# Altium PCB extBoard.PcbDoc
Units mm, origin at the board's own origin, x right, y up, seen from the top; angles counter-clockwise.
Board outline 77.47 x 63.5 mm, 2 copper layers (Top Layer, Bottom Layer); 44 components, 47 nets, 267 pads, 60 vias.
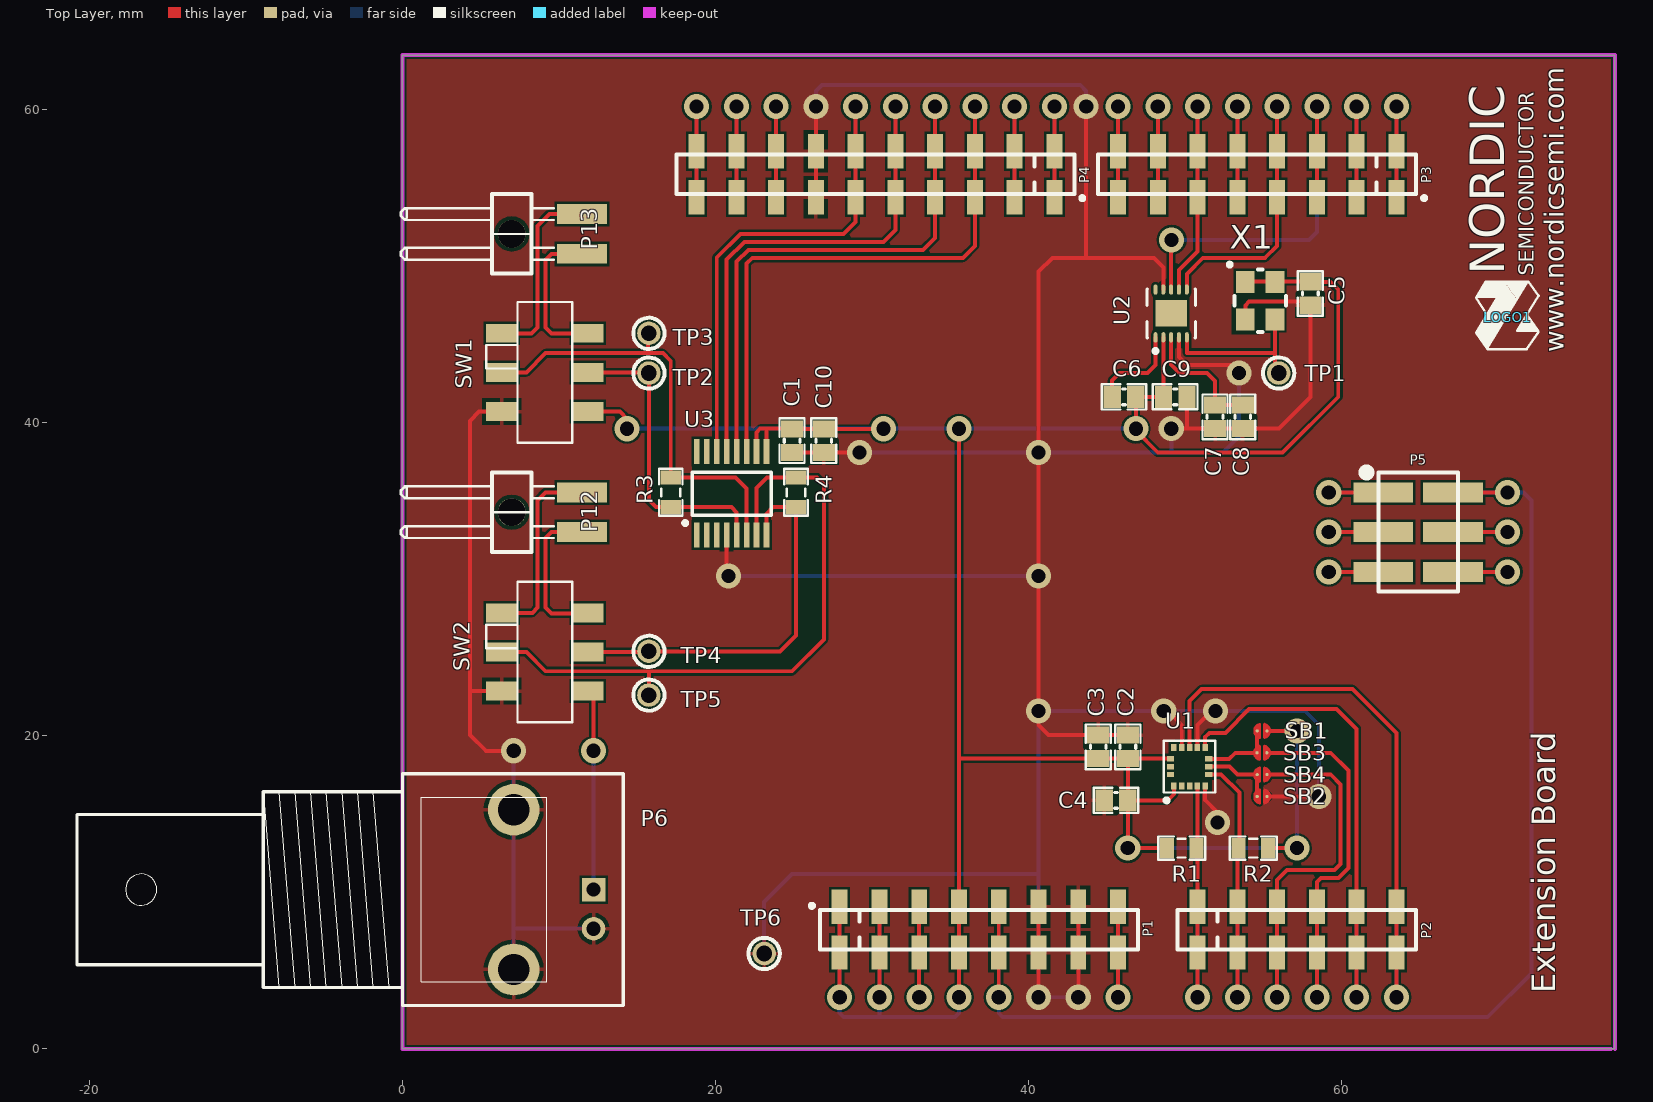
[diagram p0: Top Layer view]
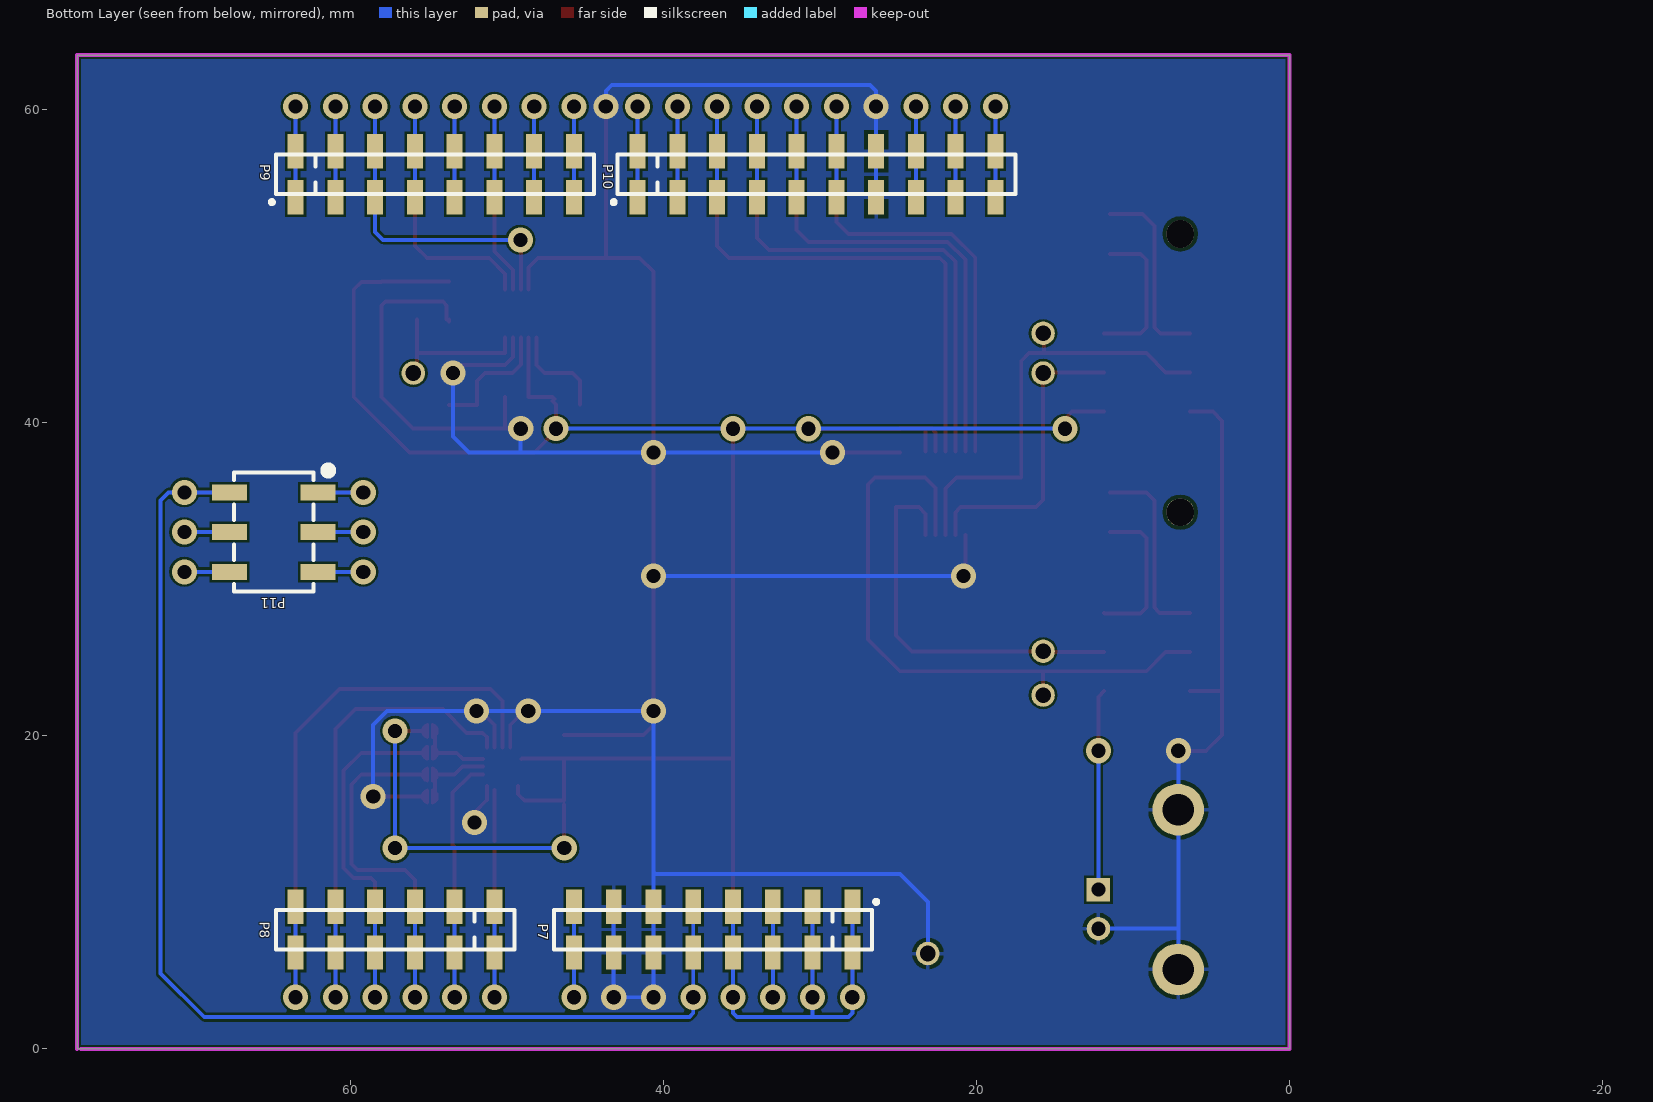
[diagram p1: Bottom Layer view, seen from below]
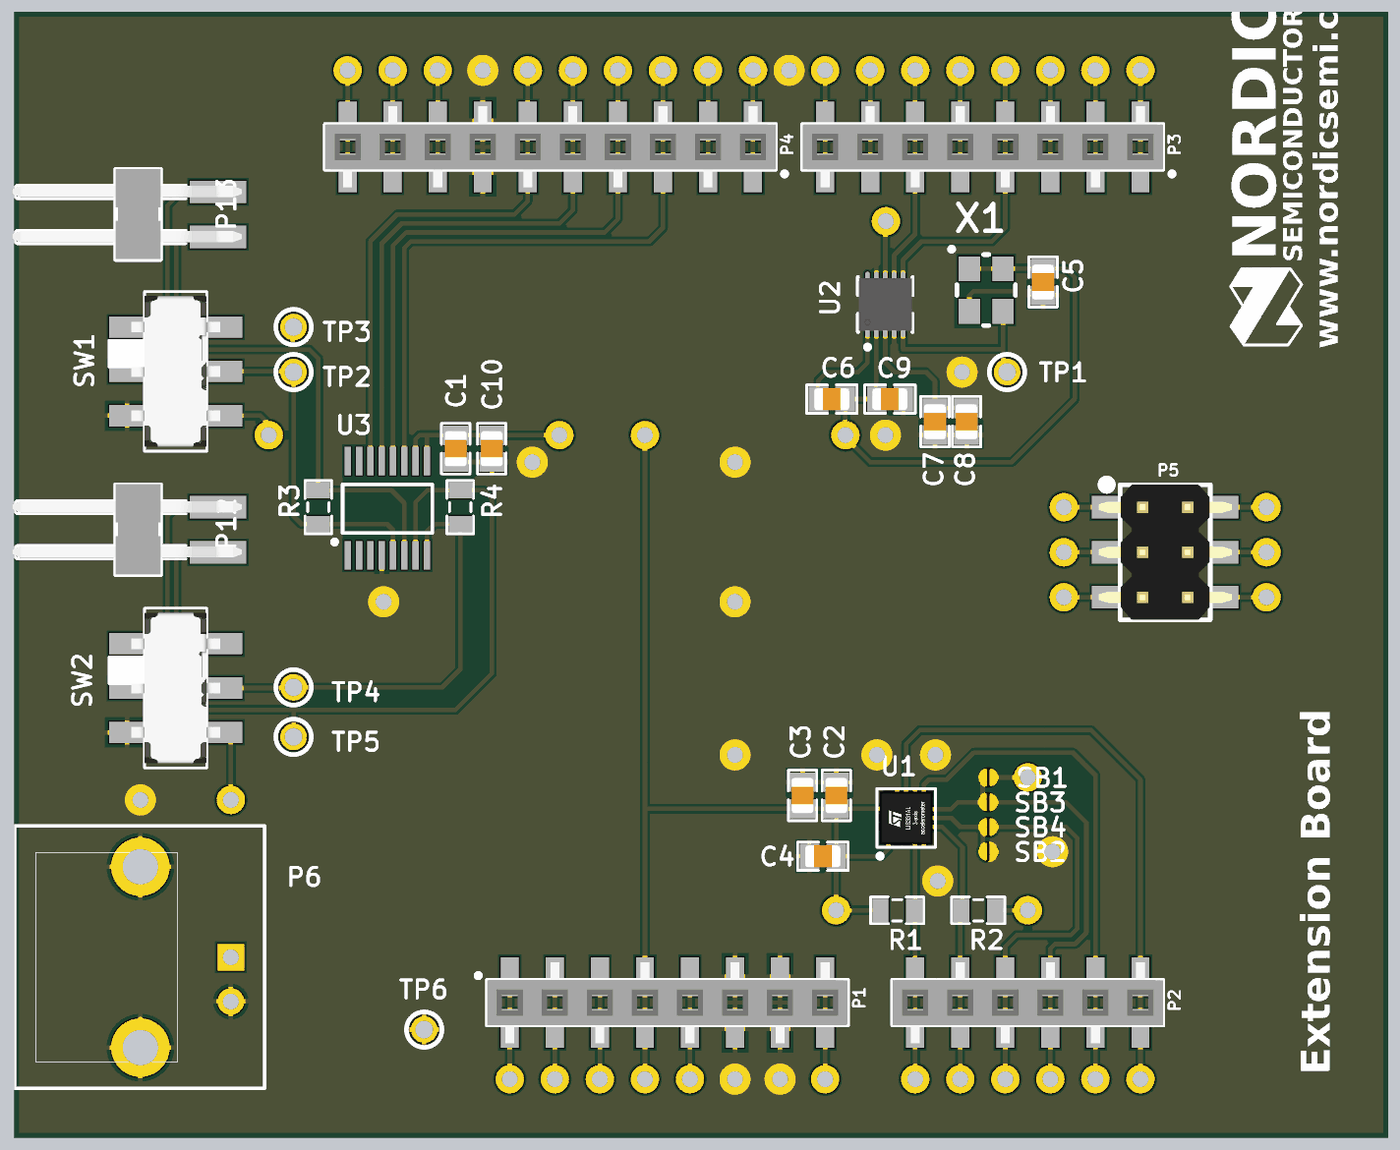
[diagram p2: 3D render of the assembled board from above, using the file's embedded part models]

## Layer stack, top to bottom
Top Solder: solder mask 0.01, Solder Resist, Dk 3.5
Top Layer: signal copper 0.035
Dielectric1: core 0.32, FR-4, Dk 4.8
Bottom Layer: signal copper 0.035
Bottom Solder: solder mask 0.01, Solder Resist, Dk 3.5

## Board outline
0,0 0,63.5 77.47,63.5 77.47,0

## Design rules (kind name [scope] priority, off if disabled: settings)
Clearance USB_Poly_Clearance [(InNamedPolygon('Top_Layer-GND')) vs (OnLayer('Mechanical 3'))] p1: gap=0.254 ignorepadtopadclearanceinfootprint=FALSE except(0: Arc-Hole Track-Hole SMDPad-Hole THPad-Hole Via-Hole Fill-Hole Poly-Hole Region-Hole Text-Hole)
Clearance "NPTH clearance" [Not PadIsPlated And HoleSize > 0] p2: gap=0.229 ignorepadtopadclearanceinfootprint=FALSE except(0: Arc-Hole Track-Hole SMDPad-Hole THPad-Hole Via-Hole Fill-Hole Poly-Hole Region-Hole Text-Hole)
Clearance USB_Clearance [(InDifferentialPairClass('All Differential Pairs'))] p3: gap=0.152 ignorepadtopadclearanceinfootprint=FALSE except(0: Arc-Hole Track-Hole SMDPad-Hole THPad-Hole Via-Hole Fill-Hole Poly-Hole Region-Hole Text-Hole)
Clearance ANT_Clerance [InNet('ANT') or InNet('RF')] p4: gap=0.203 ignorepadtopadclearanceinfootprint=FALSE except(0: Arc-Hole Track-Hole SMDPad-Hole THPad-Hole Via-Hole Fill-Hole Poly-Hole Region-Hole Text-Hole)
Clearance Polygon_Clearance [(InNamedPolygon('Top_Layer-GND')) or (InNamedPolygon('Bottom_Layer-GND')) or (InNamedPolygon('Mid_Layer_1-GND')) or (InNamedPolygon('Mid_Layer_2-VDD'))] p5: gap=0.254 ignorepadtopadclearanceinfootprint=FALSE except(0: Arc-Hole Track-Hole SMDPad-Hole THPad-Hole Via-Hole Fill-Hole Poly-Hole Region-Hole Text-Hole)
Clearance SB_Clearance [HasFootprint('Solderbridge') or HasFootprint('QFN40P180X140X55-10N')] p6: gap=0.127 ignorepadtopadclearanceinfootprint=FALSE except(0: Arc-Hole Track-Hole SMDPad-Hole THPad-Hole Via-Hole Fill-Hole Poly-Hole Region-Hole Text-Hole)
Clearance CSP_Clearance [HasFootprint('BGA4C40P2X2_76X76X62')] p7: gap=0.127 ignorepadtopadclearanceinfootprint=FALSE except(0: Arc-Hole Track-Hole SMDPad-Hole THPad-Hole Via-Hole Fill-Hole Poly-Hole Region-Hole Text-Hole)
Clearance P23_Clearance [HasFootprint('FPC_05P-0.5mm-RA-SMD')] p8: gap=0.127 ignorepadtopadclearanceinfootprint=FALSE except(0: Arc-Hole Track-Hole SMDPad-Hole THPad-Hole Via-Hole Fill-Hole Poly-Hole Region-Hole Text-Hole)
Clearance PSON35P100X50-8N_Clearance [HasFootprint('PSON35P100X50-8N')] p9: gap=0.15 ignorepadtopadclearanceinfootprint=FALSE except(0: Arc-Hole Track-Hole SMDPad-Hole THPad-Hole Via-Hole Fill-Hole Poly-Hole Region-Hole Text-Hole)
Clearance Top_layer_Clearance [All vs OnLayer('Top Layer')] p10: gap=0.145 ignorepadtopadclearanceinfootprint=FALSE except(0: Arc-Hole Track-Hole SMDPad-Hole THPad-Hole Via-Hole Fill-Hole Poly-Hole Region-Hole Text-Hole)
Clearance [All] p11: gap=0.15 ignorepadtopadclearanceinfootprint=FALSE except(0: Arc-Hole Track-Hole SMDPad-Hole THPad-Hole Via-Hole Fill-Hole Poly-Hole Region-Hole Text-Hole)
ComponentClearance [All] p1 off: gap=0.254 collisioncheckmode=3 verticalgap=0.254 showdistances=FALSE
DiffPairsRouting [All] p1: maxlimit=0.254 minlimit=0.191 mostfreqgap=0.193 toplayer_minwidth=0.165 toplayer_maxwidth=0.165 toplayer_prefwidth=0.165 bottomlayer_minwidth=0.165 bottomlayer_maxwidth=0.165 bottomlayer_prefwidth=0.165 maxuncoupledlength=12.7
FabricationTestPointUsage TestPointUsage [All] p1: valid=0 allowmultiple=FALSE
FabricationTestpoint Testpoint [All] p1: side=3 testpointundercomponent=TRUE minsize=1.016 maxsize=2.54 preferedsize=1.524 minholesize=0 maxholesize=1.016 preferedholesize=0.813 testpointgrid=0.025 allowsidetop=TRUE allowsidebottom=TRUE usegrid=TRUE gridtolerance=0
Height [All] p1 off: minheight=0 maxheight=25.4 prefheight=12.7
HoleSize [All] p1: absolutevalues=TRUE maxlimit=5 minlimit=0.15 maxpercent=80.000 minpercent=20.000
MinimumAnnularRing [All] p1 off: minimumring=0.152
NetAntennae NetAntennae_ANT [InNet('ANT')] p1: netantennaetolerance=40
NetAntennae [All] p2: netantennaetolerance=0
PolygonConnect PolygonConnect_1 [isVia and innet(gnd) or isVia and innet('VDD') or HasFootprint('COAXIAL-SWF') or isVia and innet('VDD_SAM')] p1: connectstyle=Direct reliefconductorwidth=0.254 reliefentries=4 polygonreliefangle="90 Angle" airgapwidth=0.254
PolygonConnect [All] p2: connectstyle=Relief reliefconductorwidth=0.254 reliefentries=4 polygonreliefangle="90 Angle" airgapwidth=0.254
RoomDefinition extBoard_sheet2_acc [InComponentClass('extBoard_sheet2_acc')] p1: confinementstyle=ConfineIn formatcopy=TRUE lockcomponents=FALSE outline 126.467,-15.482 154.432,-15.482 154.432,-9.64 126.467,-9.64
RoomDefinition extBoard_sheet5_connectors [InComponentClass('extBoard_sheet5_connectors')] p2: confinementstyle=ConfineIn formatcopy=TRUE lockcomponents=FALSE outline 135.757,29.527 147.999,29.527 147.999,45.656 135.757,45.656
RoomDefinition extBoard_sheet4_adc [InComponentClass('extBoard_sheet4_adc')] p3: confinementstyle=ConfineIn formatcopy=TRUE lockcomponents=FALSE outline 135.757,17.792 183.255,17.792 183.255,28.257 135.757,28.257
RoomDefinition extBoard_sheet3_interrupt_generator [InComponentClass('extBoard_sheet3_interrupt_generator')] p4: confinementstyle=ConfineIn formatcopy=TRUE lockcomponents=FALSE outline 135.757,8.496 170.809,8.496 170.809,16.522 135.757,16.522
RoutingVias RoutingVias_0.9mm [All] p1: holewidth=0.9 width=1.6 viastyle="Through Hole" minholewidth=0.9 minwidth=1.6 maxholewidth=0.9 maxwidth=1.6
RoutingVias [All] p2 off: holewidth=0.305 width=0.61 viastyle="Through Hole" minholewidth=0.15 minwidth=0.35 maxholewidth=0.305 maxwidth=0.61
SilkToSolderMaskClearance SilkscreenOverComponentPads [IsPad] p1: minsilkscreentomaskgap=0.254 clearancetoexposedcopper=TRUE
SolderMaskExpansion [All] p1: expansion=0.076
UnpouredPolygon [All] p1 off:
Width Width_10mil [All] p1: maxlimit=0.254 minlimit=0.254 preferedwidth=0.254
Width Width_Diff [(InDifferentialPairClass('All Differential Pairs'))] p2 off: maxlimit=0.165 minlimit=0.165 preferedwidth=0.165
Width [All] p3 off: maxlimit=10.16 minlimit=0.145 preferedwidth=0.152 bottomlayer_minwidth=0.152 minimp=50.000000 maximp=50.000000 favimp=50.000000
21 further rules are at their usual default settings.

## Classes and differential pairs
net class X1_Nets: GND MCLK VDK
net class U3_Nets: ADC_C\S\ ADC_MISO ADC_MOSI ADC_SCK AINN AINP GND NetU3_1 NetU3_2 NetU3_3 NetU3_15 NetU3_16 REFN REFP VDK
net class U2_Nets: D2 D3 D5 GND MCLK NetC6_1 NetC7_2 NetU2_10 VDK
net class SW2_Nets: AINN AINP EXT_AINN EXT_AINP GEN_ANALOG GND
net class SW1_Nets: EXT_REFN EXT_REFP GND REFN REFP VDK
net class R4_Nets: AINN AINP
net class R3_Nets: REFN REFP
net class R2_Nets: A1 VDK
net class P13_Nets: EXT_REFN EXT_REFP
net class P12_Nets: EXT_AINN EXT_AINP
net class P11_Nets: NetP5_1 NetP5_3 NetP5_4 NetP5_5 NetP5_6 V5V
net class P10_Nets: ADC_C\S\ ADC_MISO ADC_MOSI ADC_SCK AREF D8 D9 GND SCL SDA
net class P9_Nets: D0 D1 D2 D3 D4 D5 D6 D7
net class P8_Nets: A0 A1 A2 A3 A4 A5
net class P7_Nets: GND RESET_PIN V5V VDK VIN
net class P6_Nets: GEN_ANALOG GND
net class P5_Nets: NetP5_1 NetP5_3 NetP5_4 NetP5_5 NetP5_6 V5V
net class P4_Nets: ADC_C\S\ ADC_MISO ADC_MOSI ADC_SCK AREF D8 D9 GND SCL SDA
net class P3_Nets: D0 D1 D2 D3 D4 D5 D6 D7
net class P2_Nets: A0 A1 A2 A3 A4 A5
net class P1_Nets: GND RESET_PIN V5V VDK VIN
net class C10_Nets: GND VDK
net class C9_Nets: GND VDK
net class C8_Nets: GND NetC7_2
net class C7_Nets: GND NetC7_2
net class C6_Nets: NetC6_1 VDK
net class C5_Nets: GND VDK
net class C4_Nets: GND VDK
net class C3_Nets: GND VDK
net class C2_Nets: GND VDK
net class C1_Nets: GND VDK
component class extBoard_sheet4_adc: C1 C10 R3 R4 SW1 SW2 TP2 TP3 TP4 TP5 U3
component class extBoard_sheet2_acc: C2 C3 C4 R1 R2 SB1 SB2 SB3 SB4 U1
component class extBoard_sheet3_interrupt_generator: C5 C6 C6,C7 C7 C8 C9 TP1 U2 X1
component class extBoard_sheet5_connectors: P1 P2 P3 P4 P5 P6 P7 P8 P9 P10 P11 P12 P13 TP6
net class TP1_Nets: MCLK
net class TP2_Nets: REFP
net class TP3_Nets: REFN
net class TP4_Nets: AINP
net class TP5_Nets: AINN
net class TP6_Nets: GND
net class SB1_Nets: NetSB1_2 VDK
net class SB2_Nets: GND NetSB2_1
net class SB3_Nets: A3 NetSB1_2
net class SB4_Nets: A2 NetSB2_1
net class U1_Nets: A0 A1 A4 A5 GND NetSB1_2 NetSB2_1 NetU?_2 NetU?_3 NetU?_13 NetU?_15 NetU?_16 VDK
net class R1_Nets: A0 VDK

## Components (designator, comment, footprint, x,y, rotation, side; value= is the part's Value field where it differs from the comment)
C1 "0.1µF" CAPC2012X11L 24.892,38.862 r90 top
C2 "10µF" CAPC2012X11L 46.355,19.304 r270 top
C3 "0.1µF" CAPC2012X11L 44.45,19.304 r270 top
C4 "0.1µF" CAPC2012X11L 45.593,15.875 r0 top
C5 "0.1µF" CAPC2012X11L 58.012,48.261 r90 top
C6 "0.01µF" CAPC2012X11L 46.101,41.656 r0 top
C7 "10µF" CAPC2012X11L 51.916,40.387 r90 top
C8 "0.1µF" CAPC2012X11L 53.694,40.387 r90 top
C9 "0.1µF" CAPC2012X11L 49.376,41.657 r180 top
C10 "0.1µF" CAPC2012X11L 26.924,38.862 r90 top
LOGO1 "Nordic Logo M" NORDIC_LOGO_M 70.612,46.736 r90 top
P1 "Socket 1x8" SOCKET_1x8_SMD 27.94,7.62 r0 top locked
P2 "Socket 1x6" SOCKET_1x6_SMD 50.8,7.62 r0 top locked
P3 "Socket 1x8" SOCKET_1x8_SMD 63.5,55.88 r180 top locked
P4 "Socket 1x10" SOCKET_1x10_SMD 41.656,55.88 r180 top locked
P5 "Pin Hdr 2x3" HDR_2x3-SMD 64.897,33.02 r270 top locked
P6 "Socket 1x8" "BNC_RA CON" 12.212,10.18 r0 top
P7 "Pin List 1x8" LIST_1x8_SMD 27.94,7.62 r0 bottom locked
P8 "Pin List 1x6" LIST_1x6_SMD 50.8,7.62 r0 bottom locked
P9 "Pin List 1x8" LIST_1x8_SMD 63.5,55.88 r180 bottom locked
P10 "Pin List 1x10" LIST_1x10_SMD 41.656,55.88 r180 bottom locked
P11 "Socket 2x3" SOCKET_2x3_SMD-2.54mm-bottom 64.897,33.02 r270 top locked
P12 "Pin List 1x2, Angled" LIST_ANG_1x2-SMD-2.54MM 11.481,34.29 r270 top
P13 "Pin List 1x2, Angled" LIST_ANG_1x2-SMD-2.54MM 11.481,52.07 r270 top
R1 "10kΩ" R0805 49.784,12.827 r180 top value=10k?
R2 "10kΩ" R0805 54.356,12.827 r0 top value=10k?
R3 "*Ω" R0805 17.145,35.56 r270 top value=*?
R4 "*Ω" R0805 25.146,35.56 r90 top value=*?
SB1 "Solderbridge" Solderbridge#1 54.924,20.319 r180 top
SB2 "Solderbridge" Solderbridge#2 54.924,16.128 r0 top
SB3 "Solderbridge" Solderbridge#3 54.914,18.922 r0 top
SB4 "Solderbridge" Solderbridge#4 54.924,17.525 r180 top
SW1 "MKH-22D14-G2-B" MKH-22D14-G2-B 9.1,43.22 r270 top
SW2 "MKH-22D14-G2-B" MKH-22D14-G2-B 9.1,25.36 r270 top
TP1 "TP" TESTPAD-TH 55.98,43.181 r0 top
TP2 "TP" TESTPAD-TH 15.748,43.18 r90 top
TP3 "TP" TESTPAD-TH 15.748,45.72 r90 top
TP4 "TP" TESTPAD-TH 15.748,25.4 r0 top
TP5 "TP" TESTPAD-TH 15.748,22.606 r0 top
TP6 "TP" TESTPAD-TH 23.114,6.096 r0 top
U1 "LIS3DH" "LGA-16 (3x3x1.0mm)" 50.292,18.034 r90 top
U2 "AD9837" DFN50P300X300X95-10N 49.114,46.99 r90 top
U3 "MAX11200" QSOP16 18.814,32.847 r90 top
X1 "SG310SCF 16MHz" SG310SCF 53.853,49.009 r0 top value=16MHz

## Footprints (in the part's own frame and the unit in brackets; to place one, negate y for a bottom-side part, rotate by r counter-clockwise, add the part's x,y. Pads: shape width x height; smd on the part's side, far side on the other; paste and mask are expansions set on the pad)
"BNC_RA CON" [mm] "Connector; BNC Elbow"
  rect 1.5x1.5 hole 0.9: 1(0,0)
  round 3.3 hole 2: 2(-5.1,-5.1) 2(-5.1,5.1)
  round 1.5 hole 0.9: 2(0,-2.5)
  silkscreen extent -33,-7.4 1.9,7.4
CAPC2012X11L [mm]
  rect 1.1x1.4 smd: 1(-0.75,0) 2(0.75,0)
  silkscreen extent -1.43,-0.8 1.42,0.8, body extent -1,-0.62 1,0.63, height 0.77
DFN50P300X300X95-10N [mm] "DFN, 10-Leads, Body 3.0x3.0mm (max), Pitch 0.50mm, IPC Medium Density"
  oval 0.65x0.25 smd: 1(-1.525,1) 2(-1.525,0.5) 3(-1.525,0) 4(-1.525,-0.5) 5(-1.525,-1) 6(1.525,-1) 7(1.525,-0.5) 8(1.525,0) 9(1.525,0.5) 10(1.525,1)
  rect 1.7x2 smd: 11(0,0)
  silkscreen extent -2.52,-1.55 1.55,1.55, body extent -1.5,-1.5 1.5,1.5, height 0.8
HDR_2x3-SMD [mil] "Board-Board Conn, Header, 6-way, 2-row"
  rect 50x150 smd: 1(-100,-87.5) 2(-100,87.5) 3(0,-87.5) 4(0,87.5) 5(100,-87.5) 6(100,87.5)
  silkscreen extent -160,-140 150,100, body extent -150,-148 150,148, height 382
"LGA-16 (3x3x1.0mm)" [mm] "LGA-16 Package, 3mm x 3mm x 1mm"
  rect 0.75x0.45 on Top Solder paste-1 mask+0: 1(-1.325,1) 2(-1.325,0.5) 3(-1.325,0) 4(-1.325,-0.5) 5(-1.325,-1) 9(1.325,-1) 10(1.325,-0.5) 11(1.325,0) 12(1.325,0.5) 13(1.325,1)
  rect 0.45x0.35 smd paste-0.025 mask+0.05: 1(-1.225,1) 2(-1.225,0.5) 3(-1.225,0) 4(-1.225,-0.5) 5(-1.225,-1) 9(1.225,-1) 10(1.225,-0.5) 11(1.225,0) 12(1.225,0.5) 13(1.225,1)
  rect 0.45x0.75 on Top Solder paste-1 mask+0: 6(-0.5,-1.325) 7(0,-1.325) 8(0.5,-1.325) 14(0.5,1.325) 15(0,1.325) 16(-0.5,1.325)
  rect 0.35x0.45 smd paste-0.025 mask+0.05: 6(-0.5,-1.225) 7(0,-1.225) 8(0.5,-1.225) 14(0.5,1.225) 15(0,1.225) 16(-0.5,1.225)
  silkscreen extent -2.28,-1.65 1.65,1.65, body extent -1.5,-1.5 1.5,1.5, height 1.01
LIST_1x6_SMD [mm] "Pin List, 2.54mm, SMD"
  rect 1.02x2.19 smd: 1(0,-1.465) 1(0,1.465) 2(2.54,-1.465) 2(2.54,1.465) 3(5.08,-1.465) 3(5.08,1.465) 4(7.62,-1.465) 4(7.62,1.465) 5(10.16,-1.465) 5(10.16,1.465) 6(12.7,-1.465) 6(12.7,1.465)
  silkscreen extent -1.27,-1.27 13.97,1.27
LIST_1x8_SMD [mm] "Pin List, 2.54mm, SMD"
  rect 1.02x2.19 smd: 1(0,-1.465) 1(0,1.465) 2(2.54,-1.465) 2(2.54,1.465) 3(5.08,-1.465) 3(5.08,1.465) 4(7.62,-1.465) 4(7.62,1.465) 5(10.16,-1.465) 5(10.16,1.465) 6(12.7,-1.465) 6(12.7,1.465) 7(15.24,-1.465) 7(15.24,1.465) 8(17.78,-1.465) 8(17.78,1.465)
  silkscreen extent -1.27,-1.27 19.05,1.27
LIST_1x10_SMD [mm] "Pin List, 2.54mm, SMD"
  rect 1.02x2.19 smd: 1(0,-1.465) 1(0,1.465) 2(2.54,-1.465) 2(2.54,1.465) 3(5.08,-1.465) 3(5.08,1.465) 4(7.62,-1.465) 4(7.62,1.465) 5(10.16,-1.465) 5(10.16,1.465) 6(12.7,-1.465) 6(12.7,1.465) 7(15.24,-1.465) 7(15.24,1.465) 8(17.78,-1.465) 8(17.78,1.465) 9(20.32,-1.465) 9(20.32,1.465) 10(22.86,-1.465) 10(22.86,1.465)
  silkscreen extent -1.27,-1.27 24.13,1.27
LIST_ANG_1x2-SMD-2.54MM [mm]
  round 1.78 hole 1.78 unplated: 0(0,-4.496)
  rect 1.27x3.18 smd: 1(-1.27,0) 2(1.27,0)
  silkscreen extent -2.54,-11.58 2.54,-1.8, body extent -2.56,-11.61 2.52,1.35, height 3.03
MKH-22D14-G2-B [mm]
  rect 1.2x2 smd: 1(2.5,-2.75) 2(0,-2.75) 3(-2.5,-2.75) 4(2.5,2.75) 5(0,2.75) 6(-2.5,2.75)
  silkscreen extent -4.5,-3.75 4.5,1.75, body extent -4.25,-3.75 4.25,2.5, height 3.5
NORDIC_LOGO_M [mm] "Medium Nordic Logo"
  silkscreen extent -2.03,-1.98 2.28,2.02
QSOP16 [mm]
  rect 1.6x0.36 smd: 1(0,0) 2(0,-0.635) 3(0,-1.27) 4(0,-1.905) 5(0,-2.54) 6(0,-3.175) 7(0,-3.81) 8(0,-4.445) 9(5.31,-4.445) 10(5.31,-3.81) 11(5.31,-3.175) 12(5.31,-2.54) 13(5.31,-1.905) 14(5.31,-1.27) 15(5.31,-0.635) 16(5.31,0)
  Top Layer pour cut-out: 0.7,0.3 4.6,0.3 4.6,-4.7 0.7,-4.7
  silkscreen extent 0.63,-4.75 4,0.87
R0805 [mm]
  rect 0.9x1.3 smd: 1(-0.95,0) 2(0.95,0)
  silkscreen extent -1.5,-0.75 1.5,0.75
SG310SCF [mm]
  rect 1.2x1.4 smd: 1(0,0) 2(0,-2.4) 3(1.9,-2.4) 4(1.9,0)
  Top Layer pour cut-out: -0.6,0.7 2.5,0.7 2.5,-3.2 -0.6,-3.2
  silkscreen extent -1.12,-3.2 2.6,1.22
SOCKET_1x6_SMD [mm] "Socket, 2.54mm, SMD"
  rect 1.02x2.19 smd: 1(0,-1.465) 1(0,1.465) 2(2.54,-1.465) 2(2.54,1.465) 3(5.08,-1.465) 3(5.08,1.465) 4(7.62,-1.465) 4(7.62,1.465) 5(10.16,-1.465) 5(10.16,1.465) 6(12.7,1.465) 6(12.7,-1.465)
  silkscreen extent -1.27,-1.27 13.97,1.27, body extent -1.27,-2.29 13.97,2.29, height 7.47
SOCKET_1x8_SMD [mm] "Socket, 2.54mm, SMD"
  rect 1.02x2.19 smd: 1(0,-1.465) 1(0,1.465) 2(2.54,-1.465) 2(2.54,1.465) 3(5.08,-1.465) 3(5.08,1.465) 4(7.62,-1.465) 4(7.62,1.465) 5(10.16,-1.465) 5(10.16,1.465) 6(12.7,1.465) 6(12.7,-1.465) 7(15.24,-1.465) 7(15.24,1.465) 8(17.78,-1.465) 8(17.78,1.465)
  silkscreen extent -1.27,-1.27 19.05,1.27, body extent -1.27,-2.29 19.05,2.29, height 7.47
SOCKET_1x10_SMD [mm] "Socket, 2.54mm, SMD"
  rect 1.02x2.19 smd: 1(0,1.465) 1(0,-1.465) 2(2.54,-1.465) 2(2.54,1.465) 3(5.08,-1.465) 3(5.08,1.465) 4(7.62,-1.465) 4(7.62,1.465) 5(10.16,-1.465) 5(10.16,1.465) 6(12.7,-1.465) 6(12.7,1.465) 7(15.24,-1.465) 7(15.24,1.465) 8(17.78,-1.465) 8(17.78,1.465) 9(20.32,-1.465) 9(20.32,1.465) 10(22.86,-1.465) 10(22.86,1.465)
  silkscreen extent -1.27,-1.27 24.13,1.27, body extent -1.27,-2.29 24.13,2.29, height 7.47
SOCKET_2x3_SMD-2.54mm-bottom [mm] "Socket, 2.54mm, SMD"
  rect 1.02x2.22 smd far side: 1(-2.54,-2.825) 2(-2.54,2.825) 3(0,-2.825) 4(0,2.825) 5(2.54,-2.825) 6(2.54,2.825)
Solderbridge#1 [mm]
  round 0.2 smd paste-10: 1(-0.312,0) 2(0.312,0)
  Top Layer region: -0.077,-0.432 -0.152,-0.505 -0.271,-0.467 -0.335,-0.424 -0.409,-0.351 -0.462,-0.292 -0.521,-0.193 -0.549,-0.099 -0.544,0.122 -0.518,0.193 -0.434,0.33 -0.351,0.411 -0.259,0.469 -0.157,0.5 -0.107,0.483 -0.077,0.43
  Top Layer region: 0.077,0.432 0.152,0.505 0.271,0.467 0.335,0.424 0.409,0.351 0.462,0.292 0.521,0.193 0.549,0.099 0.544,-0.122 0.518,-0.193 0.434,-0.33 0.351,-0.411 0.259,-0.469 0.157,-0.5 0.107,-0.483 0.077,-0.43
  Top Layer lines w0.152: 0.153,0.431 cw(c0.042,0) 0.312,0.353 cw(c0.042,0) 0.323,0.345 cw(c0.042,0) 0.486,0.025 cw(c0.042,0) 0.486,0.024 cw(c0.042,0) 0.487,0 cw(c0.042,0) 0.312,-0.353 cw(c0.042,0) 0.153,-0.431 ; -0.153,0.431 ccw(c-0.042,0) -0.468,0.127 ccw(c-0.042,0) -0.471,0.118 ccw(c-0.042,0) -0.487,0.01 ccw(c-0.042,0) -0.487,0 ccw(c-0.042,0) -0.471,-0.118 ccw(c-0.042,0) -0.153,-0.431
Solderbridge#2 [mm]
  round 0.2 smd paste-10: 1(-0.312,0) 2(0.312,0)
  Top Layer region: -0.077,-0.432 -0.152,-0.505 -0.271,-0.467 -0.335,-0.424 -0.409,-0.351 -0.462,-0.292 -0.521,-0.193 -0.549,-0.099 -0.544,0.122 -0.518,0.193 -0.434,0.33 -0.351,0.411 -0.259,0.469 -0.157,0.5 -0.107,0.483 -0.077,0.43
  Top Layer region: 0.077,0.432 0.152,0.505 0.271,0.467 0.335,0.424 0.409,0.351 0.462,0.292 0.521,0.193 0.549,0.099 0.544,-0.122 0.518,-0.193 0.434,-0.33 0.351,-0.411 0.259,-0.469 0.157,-0.5 0.107,-0.483 0.077,-0.43
  Top Layer lines w0.152: -0.153,-0.431 cw(c-0.042,0) -0.471,-0.118 cw(c-0.042,0) -0.471,0.118 cw(c-0.042,0) -0.312,0.353 cw(c-0.042,0) -0.153,0.431 ; 0.153,-0.431 ccw(c0.042,0) 0.312,-0.353 ccw(c0.042,0) 0.487,0 ccw(c0.042,0) 0.487,0.001 ccw(c0.042,0) 0.153,0.431
Solderbridge#3 [mm]
  round 0.2 smd paste-10: 1(-0.312,0) 2(0.312,0)
  Top Layer region: -0.077,-0.432 -0.152,-0.505 -0.271,-0.467 -0.335,-0.424 -0.409,-0.351 -0.462,-0.292 -0.521,-0.193 -0.549,-0.099 -0.544,0.122 -0.518,0.193 -0.434,0.33 -0.351,0.411 -0.259,0.469 -0.157,0.5 -0.107,0.483 -0.077,0.43
  Top Layer region: 0.077,0.432 0.152,0.505 0.271,0.467 0.335,0.424 0.409,0.351 0.462,0.292 0.521,0.193 0.549,0.099 0.544,-0.122 0.518,-0.193 0.434,-0.33 0.351,-0.411 0.259,-0.469 0.157,-0.5 0.107,-0.483 0.077,-0.43
  Top Layer lines w0.152: -0.153,-0.431 cw(c-0.042,0) -0.471,-0.118 cw(c-0.042,0) -0.486,-0.024 cw(c-0.042,0) -0.487,0 cw(c-0.042,0) -0.471,0.118 cw(c-0.042,0) -0.312,0.353 cw(c-0.042,0) -0.302,0.361 cw(c-0.042,0) -0.153,0.431 ; 0.153,-0.431 ccw(c0.042,0) 0.312,-0.353 ccw(c0.042,0) 0.461,-0.149 ccw(c0.042,0) 0.468,-0.127 ccw(c0.042,0) 0.487,0 ccw(c0.042,0) 0.153,0.431
Solderbridge#4 [mm]
  round 0.2 smd paste-10: 1(-0.312,0) 2(0.312,0)
  Top Layer region: -0.077,-0.432 -0.152,-0.505 -0.271,-0.467 -0.335,-0.424 -0.409,-0.351 -0.462,-0.292 -0.521,-0.193 -0.549,-0.099 -0.544,0.122 -0.518,0.193 -0.434,0.33 -0.351,0.411 -0.259,0.469 -0.157,0.5 -0.107,0.483 -0.077,0.43
  Top Layer region: 0.077,0.432 0.152,0.505 0.271,0.467 0.335,0.424 0.409,0.351 0.462,0.292 0.521,0.193 0.549,0.099 0.544,-0.122 0.518,-0.193 0.434,-0.33 0.351,-0.411 0.259,-0.469 0.157,-0.5 0.107,-0.483 0.077,-0.43
  Top Layer lines w0.152: 0.153,0.431 cw(c0.042,0) 0.312,0.353 cw(c0.042,0) 0.461,0.149 cw(c0.042,0) 0.484,0.051 cw(c0.042,0) 0.487,0.001 cw(c0.042,0) 0.487,0 cw(c0.042,0) 0.487,-0.01 cw(c0.042,0) 0.48,-0.076 cw(c0.042,0) 0.312,-0.353 cw(c0.042,0) 0.153,-0.431 ; -0.153,0.431 ccw(c-0.042,0) -0.461,0.149 ccw(c-0.042,0) -0.471,0.118 ccw(c-0.042,0) -0.487,0 ccw(c-0.042,0) -0.48,-0.079 ccw(c-0.042,0) -0.471,-0.118 ccw(c-0.042,0) -0.153,-0.431
TESTPAD-TH [mm]
  round 1.5 hole 1: 1(0,0)
  silkscreen extent -1,-1 1,1

## Part data
C1 C2 C3 C4 C5 C6 C7 C8 C9 C10: library part CAP_0805, "Capacitor, X5R, ±10%", Part Number=C0805-4µ7, Artikkelnr Noca=20039266, Artikkelnr Simpro=N.A., Footprint Doc=0805, LatestRevisionDate=2013-06-04, Note=16V, Pin Count=2, Published=2009-08-21, Publisher="Nordic Semiconductor"
LOGO1: "Nordic Logo, medium size", Artikkelnr Noca=N.A., Artikkelnr Simpro=N.A., Footprint Doc="Segger Logo M", LatestRevisionDate=2016-09-07, Part Number="Nordic Logo M", Pin Count=0, Published=2010-02-18, Publisher="Nordic Semiconductor"
P1 P3: library part "Socket 1x8 SMD", "Socket 1x8, 2.54mm (100mil), SMD", 2nd source part number=SSM-108-F-SV-P-TR, Manufacturer=W-CON, Manufacturer Part Number=2171-108MS0CUNR1, 2nd source Supplier=Samtec, Artikkelnr Noca=55030002, Artikkelnr Simpro=N.A., Footprint Doc=SOCKET_1x8_SMD, LatestRevisionDate=2016-01-22, Part Number="Socket 1x8 SMD", Pin Count=8, Published=2016-01-22, Publisher="Nordic Semiconductor", Supplier=Cabcon, Supplier part number=2171-108MS0CUNR1
P2: library part "Socket 1x6 SMD", "Socket 1x6, 2.54mm (100mil), SMD", 2nd source part number=SSM-106-F-SV-P-TR, Manufacturer=W-CON, Manufacturer Part Number=2171-106MS0CUNR1, 2nd source Supplier=Samtec, Artikkelnr Noca=55030001, Artikkelnr Simpro=N.A., Footprint Doc=SOCKET_1x6_SMD, LatestRevisionDate=2016-01-22, Part Number="Socket 1x6 SMD", Pin Count=6, Published=2016-01-22, Publisher="Nordic Semiconductor", Supplier=Cabcon, Supplier part number=2171-106MS0CUNR1
P4: library part "Socket 1x10 SMD", "Socket 1x10, 2.54mm (100mil), SMD", 2nd source part number=SSM-110-F-SV-P-TR, Manufacturer=W-CON, Manufacturer Part Number=2171-110MS0CUNR1, 2nd source Supplier=Samtec, Artikkelnr Noca=55030004, Artikkelnr Simpro=N.A., Footprint Doc=SOCKET_1x10_SMD, LatestRevisionDate=2016-01-22, Part Number="Socket 1x10 SMD", Pin Count=10, Published=2016-01-22, Publisher="Nordic Semiconductor", Supplier=Cabcon, Supplier part number=2171-110MS0CUNR1
P5: library part "Pin Header 2x3 SMD", "Pin Header 2x3, 2.54mm (100mil) SMD", 2nd source part number=TSM-103-01-L-DV, Manufacturer=W-CON, Manufacturer Part Number=1125-1203S0M116R1, 2nd source Supplier=Samtec, Artikkelnr Noca=55010007, Artikkelnr Simpro=N.A., Datasheet=\\hizz\pro\app9717\Datasheet\connectores\W-CON\1125-12XXXXMXXXXX.PDF, Footprint Doc=HDR_2x3-SMD, LatestRevisionDate=2016-01-22, Note=SMD, Part Number="Pin Header 2x3 SMD", Pin Count=6, Published=2016-01-22, Publisher="Nordic Semiconductor", Supplier=Cabcon, Supplier part number=1125-1203S0M116R1
P6: library part BNC, "BNC Elbow Connector", LatestRevisionDate=17-Jul-2002, LatestRevisionNote="Re-released for DXP Platform.", Publisher="Altium Limited"
P7 P9: library part "Pin List 1x8 SMD", "Pin List 1x8, 2.54mm (100mil), SMD", 2nd source part number=TSM-108-01-L-SV-P-TR, Manufacturer=W-CON, Manufacturer Part Number=1125-1108S0M116R2, 2nd source Supplier=Samtec, Artikkelnr Noca=55010006, Artikkelnr Simpro=N.A., Assembly="Not mounted", Datasheet=\\hizz\pro\app9717\Datasheet\connectores\W-CON\1125-11XXXXMXXXXX.pdf, Footprint Doc=LIST_1x8_SMD, LatestRevisionDate=2016-01-22, Part Number="Pin List 1x8 SMD", Pin Count=8, Published=2016-01-22, Publisher="Nordic Semiconductor", Supplier=Cabcon, Supplier part number=1125-1108S0M116R2
P8: library part "Pin List 1x6 SMD", "Pin List 1x6, 2.54mm (100mil), SMD", 2nd source part number=TSM-106-01-L-SV-P-TR, Manufacturer=W-CON, Manufacturer Part Number=1125-1106S0M116R2, 2nd source Supplier=Samtec, Artikkelnr Noca=55010026, Artikkelnr Simpro=N.A., Assembly="Not mounted", Datasheet=\\hizz\pro\app9717\Datasheet\connectores\W-CON\1125-11XXXXMXXXXX.pdf, Footprint Doc=LIST_1x6_SMD, LatestRevisionDate=2016-03-29, Part Number="Pin List 1x6 SMD", Pin Count=6, Published=2016-03-29, Publisher="Nordic Semiconductor", Supplier=Cabcon, Supplier part number=1125-1106S0M116R2
P10: library part "Pin List 1x10 SMD", "Pin List 1x10, 2.54mm (100mil), SMD", 2nd source part number=TSM-110-01-L-SV-P-TR, Manufacturer=W-CON, Manufacturer Part Number=1125-1110S0M116R2, 2nd source Supplier=Samtec, Artikkelnr Noca=55010028, Artikkelnr Simpro=N.A., Assembly="Not mounted", Datasheet=\\hizz\pro\app9717\Datasheet\connectores\W-CON\1125-11XXXXMXXXXX.pdf, Footprint Doc=LIST_1x10_SMD, LatestRevisionDate=2016-03-29, Part Number="Pin List 1x10 SMD", Pin Count=10, Published=2016-03-29, Publisher="Nordic Semiconductor", Supplier=Cabcon, Supplier part number=1125-1110S0M116R2
P11: library part "Socket 2x3 SMD Bottom", "Socket 2x3, 2.54mm (100mil), SMD", 2nd source part number=SSM-103-F-DV-P-TR, Manufacturer=W-CON, Manufacturer Part Number=2171-203MS0CUNR1, 2nd source Supplier=Samtec, Artikkelnr Noca=55030010, Artikkelnr Simpro=N.A., Assembly="Not mounted", Datasheet=\\hizz\pro\app9717\Datasheet\connectores\W-CON\2171-2XXMXXCUNXX.pdf, Footprint Doc=SOCKET_2x3_SMD-2.54mm-bottom, LatestRevisionDate=2016-03-29, Part Number="Socket 2x3 SMD Bottom", Pin Count=6, Published=2014-06-10, Publisher="Nordic Semiconductor", Supplier=Cabcon, Supplier part number=2171-203MS0CUNR1
P12 P13: library part "Pin List Ang 1x2 SMD, 2.54mm", "Pin List 1x2, 2.54mm (100mil), Right Angled, SMD", 2nd source part number=TSM-102-01-L-SH-A, Manufacturer=W-CON, Manufacturer Part Number=1125B-1102S0Z135R2, 2nd source Supplier=Samtec, Artikkelnr Noca=55010023, Artikkelnr Simpro=N.A., Datasheet=\\hizz\pro\app9717\Datasheet\connectores\W-CON\1125B-11XXXXZXXXXX.pdf, Footprint Doc=LIST_ANG_1x2-SMD-2.54MM, LatestRevisionDate=2016-05-26, Part Number="Pin List Ang 1x2 SMD, 2.54mm", Pin Count=2, Published=2016-01-22, Publisher="Nordic Semiconductor", Supplier=Cabcon, Supplier part number=1125B-1102S0Z135R2
R1 R2 R3 R4: library part R0805
SB1 SB2 SB3 SB4: library part SOLDERBRIDGE, Artikkelnr Noca=N.A., Artikkelnr Simpro=N.A., Footprint Doc=Solderbridge, LatestRevisionDate=2009-12-14, Part Number=Solderbridge, Pin Count=2, Published=2009-12-14, Publisher="Nordic Semiconductor"
SW1 SW2: "Slide Switch DPDT", Manufacturer=Dailywell, Artikkelnr Noca=50019112, Artikkelnr Simpro=N.A., Datasheet=\\hizz\pro\app9717\Datasheet\switches\Dailywell\MKH-22D14-G2-B.pdf, Footprint Doc=MKH-22D14-G2-B, LatestRevisionDate=2016-08-18, Manufacturer Part Number=MKH-22D14-G2-B, Part Number=MKH-22D14-G2-B, Pin Count=6, Published=2016-08-18, Publisher="Nordic Semiconductor"
TP1 TP2 TP3 TP4 TP5 TP6: library part "Testpoint TH", "Testpoint, through hole", Artikkelnr Noca=N.A., Artikkelnr Simpro=N.A., Footprint Doc=TESTPAD-TH, LatestRevisionDate=2009-12-12, Part Number="Testpoint TH", Pin Count=1, Published=2009-12-12, Publisher="Nordic Semiconductor"
X1: library part SG310SCF

## Via types
v1: diameter 1.6, hole 0.9, Top Layer to Bottom Layer, 60 vias

## Nets (pads, with @x,y where several pads share a name; then routed paths per layer and width w, separated by ;. In a path a pad name is that pad's centre, name@x,y a point inside that pad or via, vN(x,y) a via of type N, cw(c..) or ccw(c..) an arc to the next point about the centre after c; other vN are vias at no path point)
A0: P2.1 P8.1 R1.1 U1.4@50.792,16.809 | length 19.2
  Top Layer w0.254: P2.1@50.792,8.955 P2.1@50.792,9.093 ; R1.1@50.792,12.642 P2.1@50.792,9.209 ; R1.1@50.792,13.277 50.792,16.555 ; v1(50.8,3.302) 50.8,6.155 50.8,9.085 P2.1@50.792,9.093 ; P2.1@50.861,8.77 P2.1@50.861,9.278 ; P2.1@50.792,9.093 50.734,9.151 P2.1@50.792,9.209 ; P2.1@50.792,9.093 P2.1@50.792,9.209
  Bottom Layer w0.254: v1(50.8,3.302) P8.1@50.8,9.085
A1: P2.2 P8.2 R2.1 U1.6@51.517,17.534 | length 21.8
  Top Layer w0.254: U1.6@51.517,17.534 52.308,17.534 53.467,16.375 53.467,13.02 53.34,12.893 53.34,9.085 53.34,6.155 v1(53.34,3.302) ; P2.2@53.406,8.643 P2.2@53.406,9.151
  Bottom Layer w0.254: v1(53.34,3.302) P8.2@53.34,9.085
A2: P2.3 P8.3 SB4.1 | length 27.9
  Top Layer w0.254: SB4.1 55.411,17.525 59.31,17.525 59.944,16.891 59.944,11.811 59.563,11.43 56.515,11.43 55.88,10.795 55.88,9.085 55.88,6.35 v1(55.88,3.302)
  Bottom Layer w0.254: P8.3@55.879,9.086 55.88,9.085 55.88,6.155 55.88,3.429 v1@56.007,3.302
A3: P2.4 P8.4 SB3.2 | length 27.5
  Top Layer w0.254: SB3.2 55.401,18.922 59.309,18.922 60.452,17.779 60.452,11.557 59.817,10.922 58.674,10.922 58.42,10.668 58.42,9.085 58.42,6.155 v1(58.42,3.302)
  Bottom Layer w0.254: v1(58.42,3.302) 58.42,6.155 P8.4@58.42,9.085
A4: P2.5 P8.5 U1.9@51.292,19.259 | length 34.5
  Top Layer w0.254: U1.9@51.292,19.259 51.292,19.923 51.562,20.193 52.578,20.193 54.102,21.717 59.69,21.717 60.96,20.447 60.96,9.085 60.96,6.155 v1(60.96,3.302)
  Bottom Layer w0.254: v1(60.96,3.302) P8.5@60.96,9.085
A5: P2.6 P8.6 U1.11@50.292,19.259 | length 40.3
  Top Layer w0.254: U1.11@50.292,19.259 50.292,22.225 51.054,22.987 60.706,22.987 63.5,20.193 63.5,9.085 63.5,6.155 v1(63.5,3.302)
  Bottom Layer w0.254: v1(63.5,3.302) 63.5,6.155 P8.6@63.5,9.085
ADC_C\S\: P4.3 P10.3 U3.11 | length 41.8
  Top Layer w0.254: U3.11 21.989,50.183 22.352,50.546 35.814,50.546 36.576,51.308 36.576,54.415 36.576,57.345 v1(36.576,60.198)
  Bottom Layer w0.254: P10.3@36.576,54.415 v1(36.576,60.198)
ADC_MISO: P4.5 P10.5 U3.13 | length 37.5
  Top Layer w0.254: U3.13 20.719,50.437 21.844,51.562 30.734,51.562 31.496,52.324 31.496,54.415 31.496,57.345 v1(31.496,60.198)
  Bottom Layer w0.254: P10.5@31.496,54.415 v1(31.496,60.198)
ADC_MOSI: P4.4 P10.4 U3.12 | length 39.6
  Top Layer w0.254: U3.12 21.354,50.31 22.098,51.054 33.274,51.054 34.036,51.816 34.036,54.415 34.036,57.345 v1(34.036,60.198)
  Bottom Layer w0.254: P10.4@34.036,54.415 v1(34.036,60.198)
ADC_SCK: P4.6 P10.6 U3.14 | length 35.4
  Top Layer w0.254: U3.14 20.084,50.564 21.59,52.07 28.194,52.07 28.956,52.832 28.956,54.415 28.956,57.345 v1(28.956,60.198)
  Bottom Layer w0.254: P10.6@28.956,54.415 v1(28.956,60.198)
AINN: R4.2 SW2.2 TP5.1 U3.7 | length 41.3
  Top Layer w0.254: SW2.2 7.914,25.36 9.144,24.13 15.748,24.13 ; TP5.1@15.24,22.606 15.748,23.114 15.748,24.13 ; U3.7 22.624,35.832 23.302,36.51 R4.2 26.482,36.51 26.924,36.068 26.924,26.162 24.892,24.13 15.748,24.13
AINP: R4.1 SW2.5 TP4.1 U3.8 | length 25.3
  Top Layer w0.254: SW2.5 15.2,25.36 15.24,25.4 TP4.1 24.13,25.4 25.146,26.416 R4.1 23.688,34.61 23.259,34.181 U3.8
AREF: P4.8 P10.8 | length 11.6
  Top Layer w0.254: P4.8@23.876,54.415 23.876,57.345 v1(23.876,60.198)
  Bottom Layer w0.254: P10.8@23.876,54.415 v1(23.876,60.198)
D0: P3.1 P9.1 | length 11.6
  Top Layer w0.254: P3.1@63.5,54.415 63.5,57.345 v1(63.5,60.198)
  Bottom Layer w0.254: P9.1@63.5,54.415 v1(63.5,60.198)
D1: P3.2 P9.2 | length 11.6
  Top Layer w0.254: P3.2@60.96,54.415 60.96,57.345 v1(60.96,60.198)
  Bottom Layer w0.254: P9.2@60.96,54.415 v1(60.96,60.198)
D2: P3.3 P9.3 U2.8 | length 27
  Top Layer w0.254: U2.8 49.114,51.978 49.149,51.943 v1(49.149,51.689) ; P3.3@58.42,54.415 58.42,57.345 v1(58.42,60.198)
  Bottom Layer w0.254: v1(49.149,51.689) 57.912,51.689 58.42,52.197 v1(58.42,60.198)
D3: P3.4 P9.4 U2.6 | length 22.2
  Top Layer w0.254: U2.6 50.114,49.507 51.154,50.547 55.118,50.547 55.88,51.309 55.88,54.415 55.88,57.345 v1(55.88,60.198)
  Bottom Layer w0.254: P9.4@55.88,54.415 v1(55.88,60.198)
D4: P3.5 P9.5 | length 11.6
  Top Layer w0.254: P3.5@53.34,54.415 53.34,57.345 v1(53.34,60.198)
  Bottom Layer w0.254: P9.5@53.34,54.415 v1(53.34,60.198)
D5: P3.6 P9.6 U2.7 | length 18
  Top Layer w0.254: U2.7 49.614,49.769 50.8,50.955 50.8,54.415 50.8,57.345 v1(50.8,60.198)
  Bottom Layer w0.254: P9.6@50.8,54.415 v1(50.8,60.198)
D6: P3.7 P9.7 | length 11.6
  Top Layer w0.254: P3.7@48.26,54.415 48.26,57.345 v1(48.26,60.198)
  Bottom Layer w0.254: P9.7@48.26,54.415 v1(48.26,60.198)
D7: P3.8 P9.8 | length 11.6
  Top Layer w0.254: P3.8@45.72,54.415 45.72,57.345 v1(45.72,60.198)
  Bottom Layer w0.254: P9.8@45.72,54.415 v1(45.72,60.198)
D8: P4.1 P10.1 | length 11.6
  Top Layer w0.254: P4.1@41.656,54.415 41.656,57.345 v1(41.656,60.198)
  Bottom Layer w0.254: P10.1@41.656,54.415 v1(41.656,60.198)
D9: P4.2 P10.2 | length 11.6
  Top Layer w0.254: P4.2@39.116,54.415 39.116,57.345 v1(39.116,60.198)
  Bottom Layer w0.254: P10.2@39.116,54.415 v1(39.116,60.198)
EXT_AINN: P12.1 SW2.3 | length 12.3
  Top Layer w0.254: SW2.3 8.302,27.86 8.636,28.194 8.636,35.052 9.144,35.56 P12.1
EXT_AINP: P12.2 SW2.6 | length 9.8
  Top Layer w0.254: P12.2 9.525,33.02 9.144,32.639 9.144,28.194 9.525,27.813 11.803,27.813 SW2.6
EXT_REFN: P13.1 SW1.3 | length 12.1
  Top Layer w0.254: SW1.3 8.255,45.72 8.636,46.101 8.636,52.578 9.398,53.34 P13.1
EXT_REFP: P13.2 SW1.6 | length 9.7
  Top Layer w0.254: P13.2 9.525,50.8 9.144,50.419 9.144,46.101 9.525,45.72 SW1.6
GEN_ANALOG: P6.1 SW2.4 | length 12.8
  Top Layer w0.254: SW2.4 12.212,22.498 v1(12.212,19.05)
  Bottom Layer w0.254: P6.1 v1(12.212,19.05)
GND: C1.1 C2.1 C3.1 C4.1 C5.1 C7.1 C8.1 C9.1 C10.1 P1.6 P1.7 P4.7 P6.2 P7.6 P7.7 P10.7 SB2.2 SW1.1 SW2.1 TP6.1 U1.5@51.292,16.809 U1.10@50.792,19.259 U1.12@49.792,19.259 U2.4 U2.9 U3.4 X1.2 | length 320.5
  Top Layer w0.254: SW2.1 4.318,22.86 ; SW1.1 4.906,40.72 4.318,40.132 4.318,22.86 ; v1(7.112,19.05) 5.334,19.05 4.318,20.066 4.318,22.86 ; U3.4 20.719,30.335 v1(20.828,30.226) v1@20.828,30.734 ; C1.1 C10.1 26.936,38.1 v1(29.21,38.1) ; P4.7@26.416,54.415 26.416,57.345 v1(26.416,60.198) ; v1(40.64,3.302) 40.64,6.155 P1.6@40.64,9.085 ; v1(43.18,3.302) 43.18,6.155 P1.7@43.18,9.085 ; v1(43.688,60.198) 43.688,50.546 ; C2.1 C3.1 41.287,20.054 40.64,20.701 v1(40.64,21.59) 40.64,29.972 40.767,30.099 v1(40.64,30.226) v1(40.64,38.1) 40.64,49.657 41.529,50.546 43.688,50.546 ; U2.9 48.614,49.938 48.006,50.546 43.688,50.546 ; v1(48.641,21.59) 48.895,21.59 49.792,20.693 U1.12@49.792,19.259 ; v1(49.122,39.625) 48.638,39.625 48.626,39.637 50.102,39.637 ; U2.4 49.614,44.213 50.138,43.689 52.932,43.689 v1(53.44,43.181) ; C9.1 50.126,39.661 50.102,39.637 ; U1.10@50.792,19.259 50.792,20.693 51.689,21.59 v1(51.943,21.59) ; U1.5@51.292,16.809 51.292,15.891 52.07,15.113 v1(52.07,14.478) ; X1.2@53.694,46.483 X1.2@53.694,46.609 ; X1.2 53.853,47.504 54.101,47.752 57.771,47.752 C5.1 58.012,41.657 55.992,39.637 C8.1 C7.1 50.102,39.637 ; SB2.2 55.238,16.129 55.411,16.129 v1(58.547,16.129)
  Bottom Layer w0.254: P6.2@7.112,5.08 7.112,7.62 ; v1(7.112,19.05) 7.112,15.28 7.112,7.62 ; P6.2@12.212,7.68 7.172,7.68 7.112,7.62 ; v1(20.828,30.226) v1(40.64,30.226) ; TP6.1 23.114,9.398 24.892,11.176 40.513,11.176 40.64,11.303 ; P10.7@26.416,54.415 v1(26.416,60.198) 26.416,61.214 26.797,61.595 43.307,61.595 43.688,61.214 v1(43.688,60.198) ; v1(29.21,38.1) v1(40.64,38.1) 37.606,38.1 37.605,38.101 49.122,38.101 ; v1@40.64,21.018 41.212,21.59 v1(48.641,21.59) v1(51.943,21.59) 57.658,21.59 58.547,20.701 v1(58.547,16.129) ; v1(40.64,21.59) 40.64,11.303 ; P7.7@43.18,9.085 v1(43.18,3.302) v1(40.64,3.302) 40.64,9.085 40.64,11.303 ; v1(49.122,39.625) 49.122,38.101 ; v1(53.44,43.181) 53.44,39.117 52.424,38.101 49.122,38.101
MCLK: TP1.1 U2.5 X1.3 | length 10.2
  Top Layer w0.254: U2.5 50.114,44.475 55.753,44.475 ; X1.3 55.753,44.475 ; TP1.1 55.753,43.408 55.753,44.475
NetC6_1: C6.1 U2.1 | length 6.5
  Top Layer w0.254: C6.1@45.339,41.176 45.339,42.7 45.82,43.181 47.598,43.181 48.114,43.697 U2.1
NetC7_2: C7.2 C8.2 U2.3 | length 8.3
  Top Layer w0.254: U2.3 49.114,43.723 49.656,43.181 51.408,43.181 51.916,42.673 C7.2 C8.2
NetP5_1: P5.1 P11.1 | length 6.4
  Top Layer w0.254: v1(59.182,35.56) P5.1
  Bottom Layer w0.254: v1(59.182,35.56) P11.1
NetP5_3: P5.3 P11.3 | length 6.4
  Top Layer w0.254: v1(59.182,33.02) P5.3
  Bottom Layer w0.254: v1(59.182,33.02) P11.3
NetP5_4: P5.4 P11.4 | length 6.4
  Top Layer w0.254: P5.4 v1(70.612,33.02)
  Bottom Layer w0.254: P11.4 v1(70.612,33.02)
NetP5_5: P5.5 P11.5 | length 6.4
  Top Layer w0.254: v1(59.182,30.48) P5.5
  Bottom Layer w0.254: v1(59.182,30.48) P11.5
NetP5_6: P5.6 P11.6 | length 6.4
  Top Layer w0.254: P5.6 v1(70.612,30.48)
  Bottom Layer w0.254: P11.6 v1(70.612,30.48)
NetSB1_2: SB1.2 SB3.1 U1.8@51.517,18.534 | length 4.7
  Top Layer w0.254: U1.8@51.517,18.534 52.824,18.534 53.212,18.922 54.427,18.922 SB3.1 ; SB3.1@54.612,18.932 SB3.1 ; SB1.2 54.602,20.309 54.602,19.974 54.602,19.275 SB3.1
NetSB2_1: SB2.1 SB4.2 U1.7@51.517,18.034 | length 4.3
  Top Layer w0.254: U1.7@51.517,18.034 52.832,18.034 53.341,17.525 54.437,17.525 SB4.2 ; SB2.1 54.612,16.481 54.612,17.172
REFN: R3.1 SW1.2 TP3.1 U3.6 | length 28.5
  Top Layer w0.254: SW1.2 7.914,43.22 9.144,44.45 15.694,44.45 ; TP3.1@15.24,45.72 15.694,45.266 15.694,44.45 ; U3.6 21.989,35.796 21.275,36.51 R3.1 17.145,43.942 16.637,44.45 15.694,44.45
REFP: R3.2 SW1.5 TP2.1 U3.5 | length 18.9
  Top Layer w0.254: SW1.5 15.2,43.22 TP2.1@15.24,43.18 ; TP2.1@15.875,43.18 15.748,43.053 15.748,35.057 16.195,34.61 R3.2 21.016,34.61 21.354,34.272 U3.5
RESET_PIN: P1.3 P7.3 | length 11.6
  Top Layer w0.254: v1(33.02,3.302) 33.02,6.155 P1.3@33.02,9.085
  Bottom Layer w0.254: v1(33.02,3.302) P7.3@33.02,9.085
SCL: P4.10 P10.10 | length 11.6
  Top Layer w0.254: P4.10@18.796,54.415 18.796,57.345 v1(18.796,60.198)
  Bottom Layer w0.254: P10.10@18.796,54.415 v1(18.796,60.198)
SDA: P4.9 P10.9 | length 11.6
  Top Layer w0.254: P4.9@21.336,54.415 21.336,57.345 21.336,59.944 v1(21.336,60.198)
  Bottom Layer w0.254: P10.9@21.336,54.415 v1(21.336,60.198)
V5V: P1.5 P5.2 P7.5 P11.2 | length 86.2
  Top Layer w0.254: v1(38.1,3.302) 38.1,6.155 P1.5@38.1,9.085 ; P5.2 v1(70.612,35.56)
  Bottom Layer w0.254: P7.5@38.1,9.085 v1(38.1,3.302) 38.1,2.286 38.354,2.032 69.342,2.032 72.136,4.826 72.136,35.052 71.628,35.56 v1(70.612,35.56) P11.2
VDK: C1.2 C2.2 C3.2 C4.2 C5.2 C6.2 C9.2 C10.2 P1.1 P1.2 P1.4 P7.1 P7.2 P7.4 R1.2 R2.2 SB1.1 SW1.4 U1.1@49.292,16.809 U1.14@49.067,18.534 U2.2 U3.9 U3.10 X1.1 X1.4 | length 205
  Top Layer w0.254: SW1.4 13.89,40.72 14.351,40.259 v1(14.351,39.624) ; U3.10 22.624,39.388 22.86,39.624 23.259,39.624 ; U3.9 23.259,39.624 ; v1(27.94,3.302) 27.94,6.155 P1.1@27.94,9.085 ; v1(30.48,3.302) 30.48,6.155 P1.2@30.48,9.085 ; v1(30.734,39.624) 30.722,39.612 C10.2 C1.2 24.88,39.624 23.259,39.624 ; v1(35.56,3.302) 35.56,6.155 35.56,9.085 35.56,18.554 ; v1(35.56,39.624) 35.56,36.83 35.56,18.554 ; v1(46.343,12.827) R1.2@48.575,12.827 ; v1@46.343,13.462 C4.2@46.343,15.621 ; C6.2@46.951,41.53 47.09,41.391 46.863,41.164 v1(46.863,39.625) 46.863,39.497 48.259,38.101 56.234,38.101 59.79,41.657 59.79,48.515 59.294,49.011 C5.2 58,49.023 X1.1@53.694,49.023 ; C6.2@47.078,41.657 C9.2 48.614,41.669 U2.2 ; U1.14@49.067,18.534 49.047,18.554 C2.2 ; U1.1@49.292,16.809 49.292,16.272 48.895,15.875 C4.2 46.355,15.887 C2.2 ; SB1.1@55.247,20.309 SB1.1 55.411,20.319 v1(57.15,20.32) v1(57.15,20.32) ; R2.2 v1(57.15,12.827) ; 35.56,18.554 C3.2 C2.2
  Bottom Layer w0.254: v1(14.351,39.624) v1(30.734,39.624) v1(35.56,39.624) v1(46.863,39.625) ; P7.1@27.94,9.085 v1(27.94,3.302) 27.94,2.286 28.194,2.032 30.48,2.032 ; P7.2@30.48,9.085 v1(30.48,3.302) 30.48,2.032 ; P7.4@35.56,9.085 v1(35.56,3.302) 35.56,2.286 35.306,2.032 30.48,2.032 ; v1(46.343,12.827) v1(57.15,12.827) ; v1@57.15,12.7 v1(57.15,12.827) ; v1@57.15,20.066 v1(57.15,12.827)
VIN: P1.8 P7.8 | length 11.6
  Top Layer w0.254: v1(45.72,3.302) 45.72,6.155 P1.8@45.72,9.085
  Bottom Layer w0.254: v1(45.72,3.302) P7.8@45.72,9.085
pads on no net: P12.0 P13.0 U1.1@49.292,16.709 U1.2 U1.3 U1.4@50.792,16.709 U1.5@51.292,16.709 U1.6@51.617,17.534 U1.7@51.617,18.034 U1.8@51.617,18.534 U1.9@51.292,19.359 U1.10@50.792,19.359 U1.11@50.292,19.359 U1.12@49.792,19.359 U1.13 U1.14@48.967,18.534 U1.15 U1.16 U2.10 U2.11 U3.1 U3.2 U3.3 U3.15 U3.16

## Polygon pours and split planes (outlines as drawn)
GND on Top Layer "Top Layer-GND" (solid, remove dead copper, pour order 0): -4.318,67.818 -4.318,-5.08 81.28,-5.08 81.28,67.818
GND on Bottom Layer "Bottom Layer-GND" (solid, remove dead copper, pour order 2): -4.318,67.818 -4.318,-5.08 81.28,-5.08 81.28,67.818

## Keep-outs
Keep-Out Layer:
  lines w0.254: 77.216,0 0,0 0,63.5 77.47,63.5 77.47,1.27 77.47,0

## Other copper
Top Layer:
  pour cut-out: 49.292,19.259 49.292,16.809 51.292,16.809 51.292,19.259

## Silkscreen, mask and mechanical layers (free items; w line width, h text height)
Top Overlay:
  circle w0.254: c26.162,9.144 r0.127
  circle w0.254: c65.278,54.356 r0.127
  circle w0.254: c43.434,54.356 r0.127
  text "NORDIC" at 71.122,49.471 h3.81 r90
  text "SEMICONDUCTOR" at 72.613,49.385 h1.65 r90
  text "www.nordicsemi.com" at 74.625,44.501 h2.11 r90
  text "Extension Board" at 74.168,3.556 h2.54 r90
Bottom Overlay:
  circle w0.254: c26.416,9.398 r0.127
  circle w0.254: c65.024,54.102 r0.127
  circle w0.254: c43.18,54.102 r0.127
Mechanical 1:
  lines w0.254: 0,0 0,0 ; 0,0 0,63.5 77.216,63.5 ; 0,0 77.47,0 77.47,63.5 63.5,63.5 ; 63.5,63.5 77.216,63.5 ; 63.5,63.5 63.5,63.5 ; 77.216,63.5 77.216,63.5
Mechanical 4:
  lines w0.165: 8.551,31.901 12.639,31.901 ccw(c12.639,32.944) 13.376,32.207 14.604,33.435 ; 8.552,32.259 12.645,32.259 ccw(c12.645,32.935) 13.123,32.457 14.332,33.666 ; 14.329,33.669 cw(c15.565,32.433) 15.555,34.181 ; 14.599,33.43 cw(c15.555,32.464) 15.555,33.823
Drill Drawing:
  lines w0.254: -34.56,87.757 -32.866,87.757 -32.866,89.45 -34.56,89.45 -34.56,87.757
  lines w0.381: -36.078,75.184 124.711,75.184 ; -36.078,90.424 124.711,90.424 ; -22.086,71.374 -22.086,94.234 ; -8.374,71.374 -8.374,94.234 ; 20.066,71.374 20.066,94.234 ; 32.915,71.374 32.915,94.234 ; 51.554,71.374 51.554,94.234 ; 89.642,71.374 89.642,94.234 ; 104.625,71.374 104.625,94.234 ; -36.078,71.374 124.711,71.374 124.711,94.234 -36.078,94.234 -36.078,71.374
  text "Symbol" at -33.792,91.567 h1.83
  text "Count" at -20.943,91.567 h1.83
  text "Hole Size" at -7.231,91.567 h1.83
  text "Plated" at 21.209,91.567 h1.83
  text "Hole Type" at 34.058,91.567 h1.83
  text "Drill Layer Pair" at 52.697,91.567 h1.83
  text "Via/Pad" at 90.785,91.567 h1.83
  text "Pad Shape" at 105.768,91.567 h1.83
  text "2" at -20.943,87.757 h1.52
  text "1,780mm (70,08mil)" at -7.231,87.757 h1.52
  text "NPTH" at 21.209,87.757 h1.52
  text "Round" at 34.058,87.757 h1.52
  text "Top Layer - Bottom Layer" at 52.697,87.757 h1.52
  text "Pad" at 90.785,87.757 h1.52
  text "Rounded" at 105.768,87.757 h1.52
  text "2" at -20.943,83.947 h1.52
  text "2,000mm (78,74mil)" at -7.231,83.947 h1.52
  text "PTH" at 21.209,83.947 h1.52
  text "Round" at 34.058,83.947 h1.52
  text "Top Layer - Bottom Layer" at 52.697,83.947 h1.52
  text "Pad" at 90.785,83.947 h1.52
  text "Rounded" at 105.768,83.947 h1.52
  text "D" at -34.531,83.693 h1.69
  text "6" at -20.943,80.137 h1.52
  text "1,000mm (39,37mil)" at -7.231,80.137 h1.52
  text "PTH" at 21.209,80.137 h1.52
  text "Round" at 34.058,80.137 h1.52
  text "Top Layer - Bottom Layer" at 52.697,80.137 h1.52
  text "Pad" at 90.785,80.137 h1.52
  text "Rounded" at 105.768,80.137 h1.52
  text "B" at -34.531,79.883 h1.69
  text "62" at -20.943,76.327 h1.52
  text "0,900mm (35,43mil)" at -7.231,76.327 h1.52
  text "PTH" at 21.209,76.327 h1.52
  text "Round" at 34.058,76.327 h1.52
  text "Top Layer - Bottom Layer" at 52.697,76.327 h1.52
  text "(Mixed)" at 90.785,76.327 h1.52
  text "(Mixed)" at 105.768,76.327 h1.52
  text "A" at -34.531,76.073 h1.69
  text "72 Total" at -20.943,72.517 h1.52